# EAGLE board MSP430FR2433_SMD_0603 (EAGLE 7.5.0)

Size 160 x 100 mm. Coordinates in mm from the lower left corner, seen from the top.
Outline: 0,0 160,0 160,100 0,100 0,0
Copper layers (1*16): Top 0.035mm / dielectric 1.5mm / Bottom 0.035mm
Design rules "default": minimum track width 10mil, minimum drill 24mil, track to track 8mil, track to pad 8mil, pad to pad 8mil, via to via 8mil, smd to smd 8mil, copper to edge 40mil, drill to drill 8mil, minimum pad ring 10mil, minimum via ring 8mil, stop-mask expansion 4mil, vias tented up to drill 0mil, thermal gap 10mil

## Footprints (pad centres in the part's own frame; a part is rotated, then mirrored left to right if it is on the bottom)
C0402 = smd 0.7 x 0.9: 1 -0.65,0; 2 0.65,0
QFN50P400X400X100-25N = smd 0.8 x 0.3: 1 -2,1.25; 2 -2,0.75; 3 -2,0.25; 4 -2,-0.25; 5 -2,-0.75; 6 -2,-1.25; 13 2,-1.25; 14 2,-0.75; 15 2,-0.25; 16 2,0.25; 17 2,0.75; 18 2,1.25 | smd 0.3 x 0.8: 7 -1.25,-2; 8 -0.75,-2; 9 -0.25,-2; 10 0.25,-2; 11 0.75,-2; 12 1.25,-2; 19 1.25,2; 20 0.75,2; 21 0.25,2; 22 -0.25,2; 23 -0.75,2; 24 -1.25,2 | smd 2.8 x 2.8: 25 0,0
10X06MTA = drill 1.016 long: 1 6.35,0; 2 3.81,0; 3 1.27,0; 4 -1.27,0; 5 -3.81,0; 6 -6.35,0
TC26H = drill 0.813: 1 -1.27,0; 2 1.27,0
R0402 = smd 0.7 x 0.9: 1 -0.65,0; 2 0.65,0

## Placement (x,y rotation side)
C1  [C0402]  -30.48,-53.34 0 top  (outside the outline)
C2  9p  [C0402]  -36.83,-57.15 0 top  (outside the outline)
C3  9p  [C0402]  -36.83,-60.96 0 top  (outside the outline)
C4  4.7u  [C0402]  -36.83,-64.77 0 top  (outside the outline)
C5  1.1n  [C0402]  -30.48,-7.62 0 top  (outside the outline)
C10  100n  [C0402]  -36.83,-68.58 0 top  (outside the outline)
IC2  MSP430FR2433IRGET  [QFN50P400X400X100-25N]  -22.86,21.59 0 top  (outside the outline)
J2  [10X06MTA]  -29.21,-83.82 0 top  (outside the outline)
Q1  32.768  [TC26H]  -34.29,-78.74 0 top  (outside the outline)
R1  47k  [R0402]  -30.48,-49.53 0 top  (outside the outline)
R2  47K  [R0402]  -30.48,-2.54 0 top  (outside the outline)

## Library data of the parts
C1-C5 C10 R1 R2 = rcl
IC2 = MSP430fr24333; DESCRIPTION: 16-bit Microcontrollers - MCU 16 MHz Ultra-Low-Power Microcontroller with 16 KB FRAM, 4 KB RAM, 10-bit ADC, 19 IO, 4 16-bit Timers 24-VQFN -40 to 85; HEIGHT: 1mm; MANUFACTURER_NAME: Texas Instruments; MANUFACTURER_PART_NUMBER: MSP430FR2433IRGET; MOUSER_PART_NUMBER: 595-SP430FR2433IRGET; MOUSER_PRICE-STOCK: https://www.mouser.co.uk/ProductDetail/Texas-Instruments/MSP430FR2433IRGET?qs=bY1dm4K8r4WBEjjMCxA0VQ%3D%3D
J2 = con-amp
Q1 = crystal

## Nets
CLK_A1: IC2.15
GND: C1.2 C2.2 C3.2 C4.2 C5.2 C10.2 IC2.25 J2.5
MISO: IC2.16
MOSI: IC2.17
N$3: C3.1 IC2.22 Q1.2
N$7: IC2.5
N$8: IC2.6
N$9: IC2.7
N$10: IC2.8
N$13: IC2.11
N$14: IC2.12
N$15: IC2.20
N$16: IC2.19
N$21: IC2.14
N$22: IC2.13
RESET: C1.1 C5.1 IC2.1 J2.1 R1.1 R2.1
RXD: IC2.4 J2.3
SCL: IC2.10
SDA: IC2.9
TEST: IC2.2 J2.2
TXD: IC2.3 J2.4
VCC: C4.1 C10.1 IC2.18 IC2.23 IC2.24 J2.6 R1.2 R2.2
XOUT: C2.1 IC2.21 Q1.1

## Tracks (layer width: path | path; a pad name or v marks a point on that pad's centre or on a via)
GND  (7 unrouted)
N$3  (2 unrouted)
RESET  (5 unrouted)
RXD  (1 unrouted)
TEST  (1 unrouted)
TXD  (1 unrouted)
VCC  (7 unrouted)
XOUT  (2 unrouted)